# Altium PCB RobotPCB.PcbDoc
Units mm, origin at the board's own origin, x right, y up, seen from the top; angles counter-clockwise.
Board outline 96 x 94 mm, 2 copper layers (Top Layer, Bottom Layer), stack 1.071 mm thick; 70 components, 74 nets, 321 pads, 203 vias.
Unrouted connection lines stored in the file: 1.
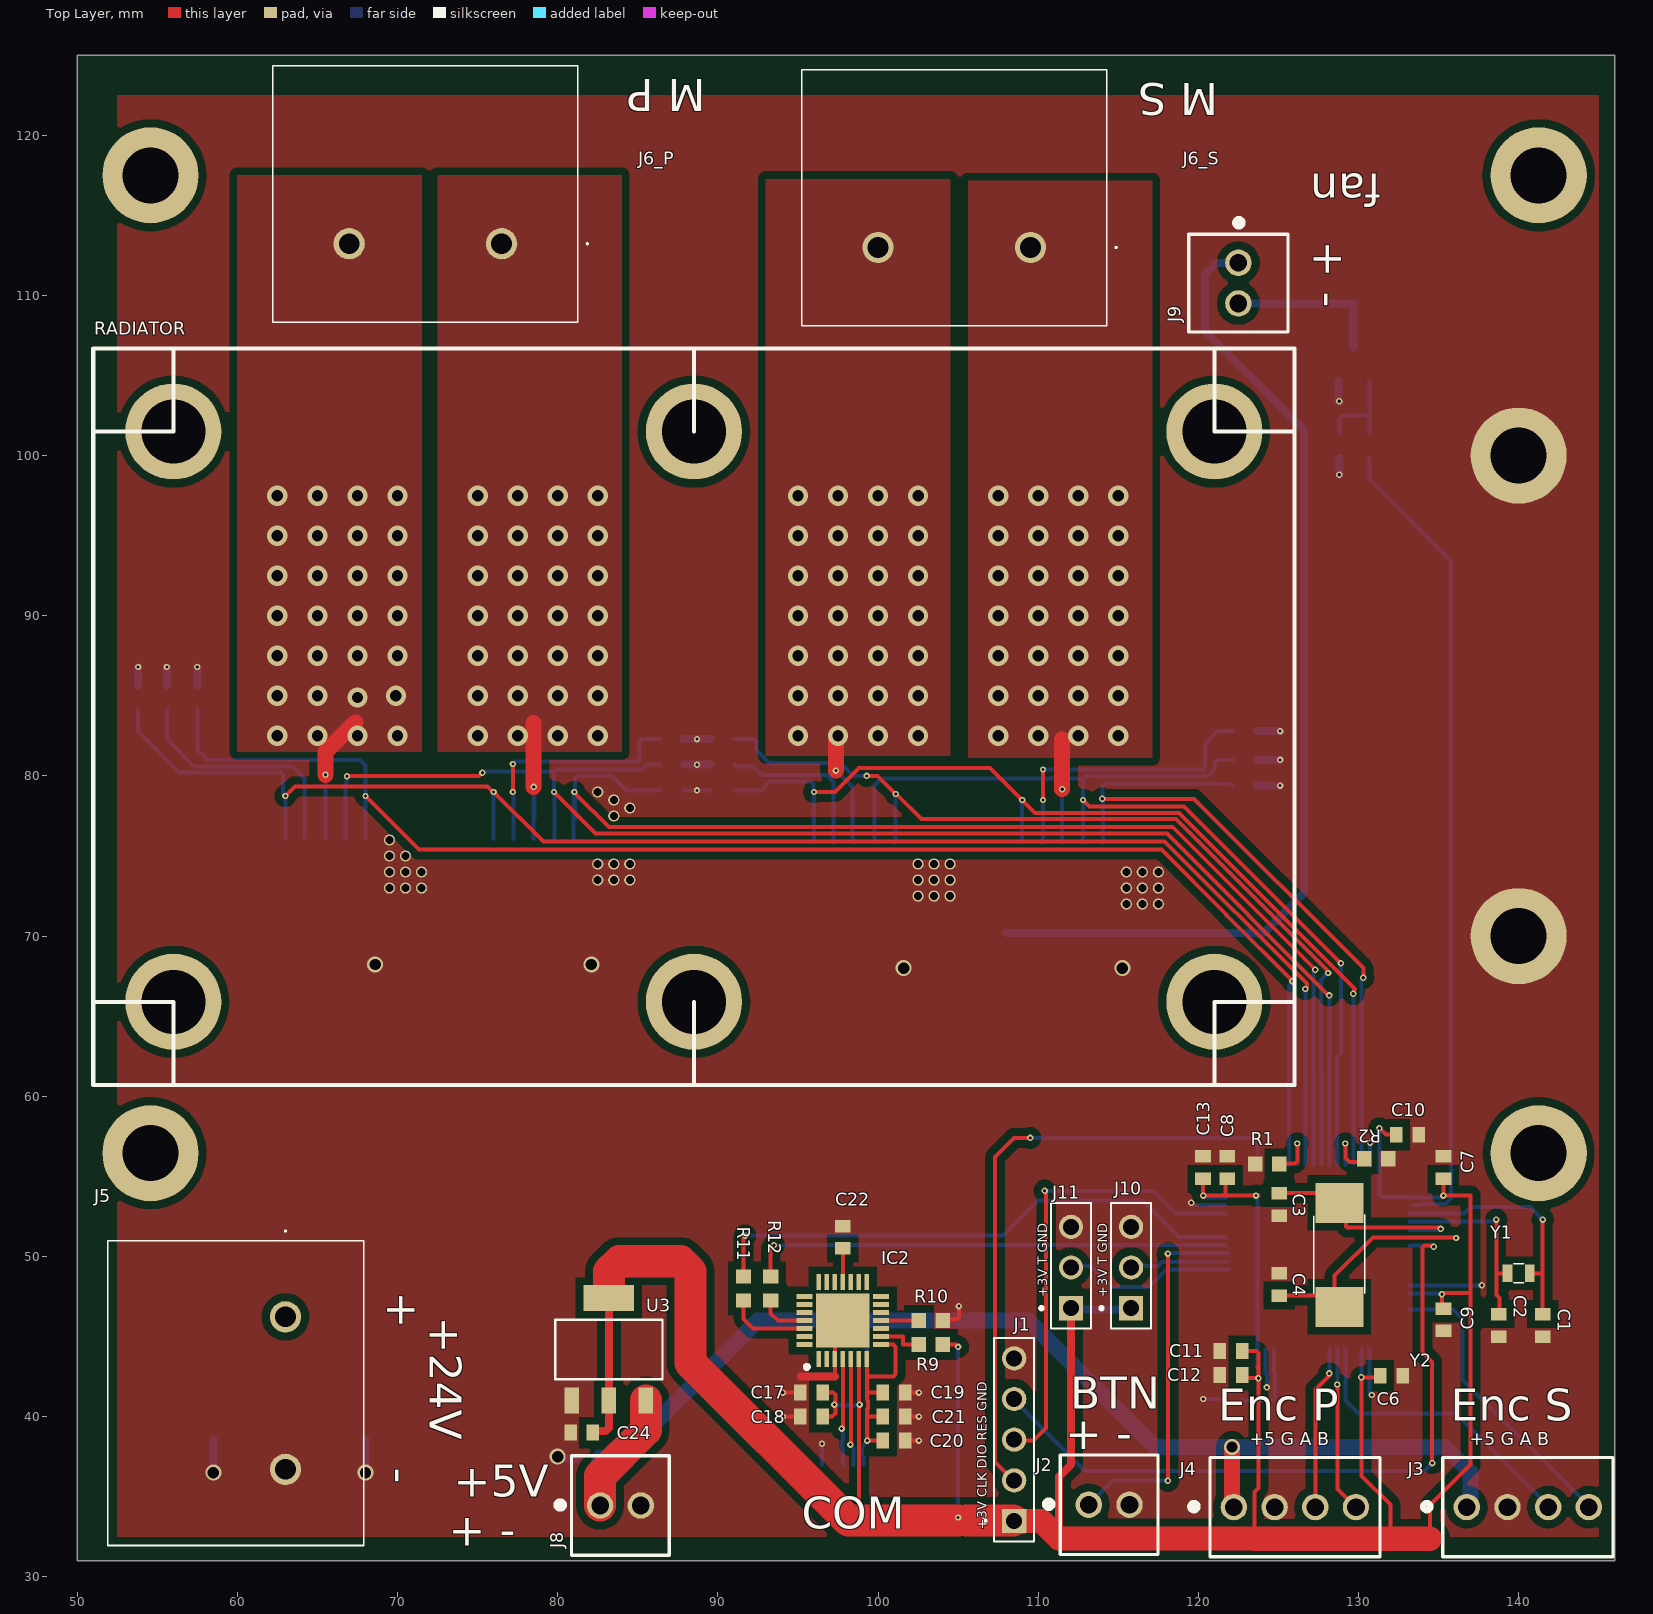
[diagram p0: Top Layer view]
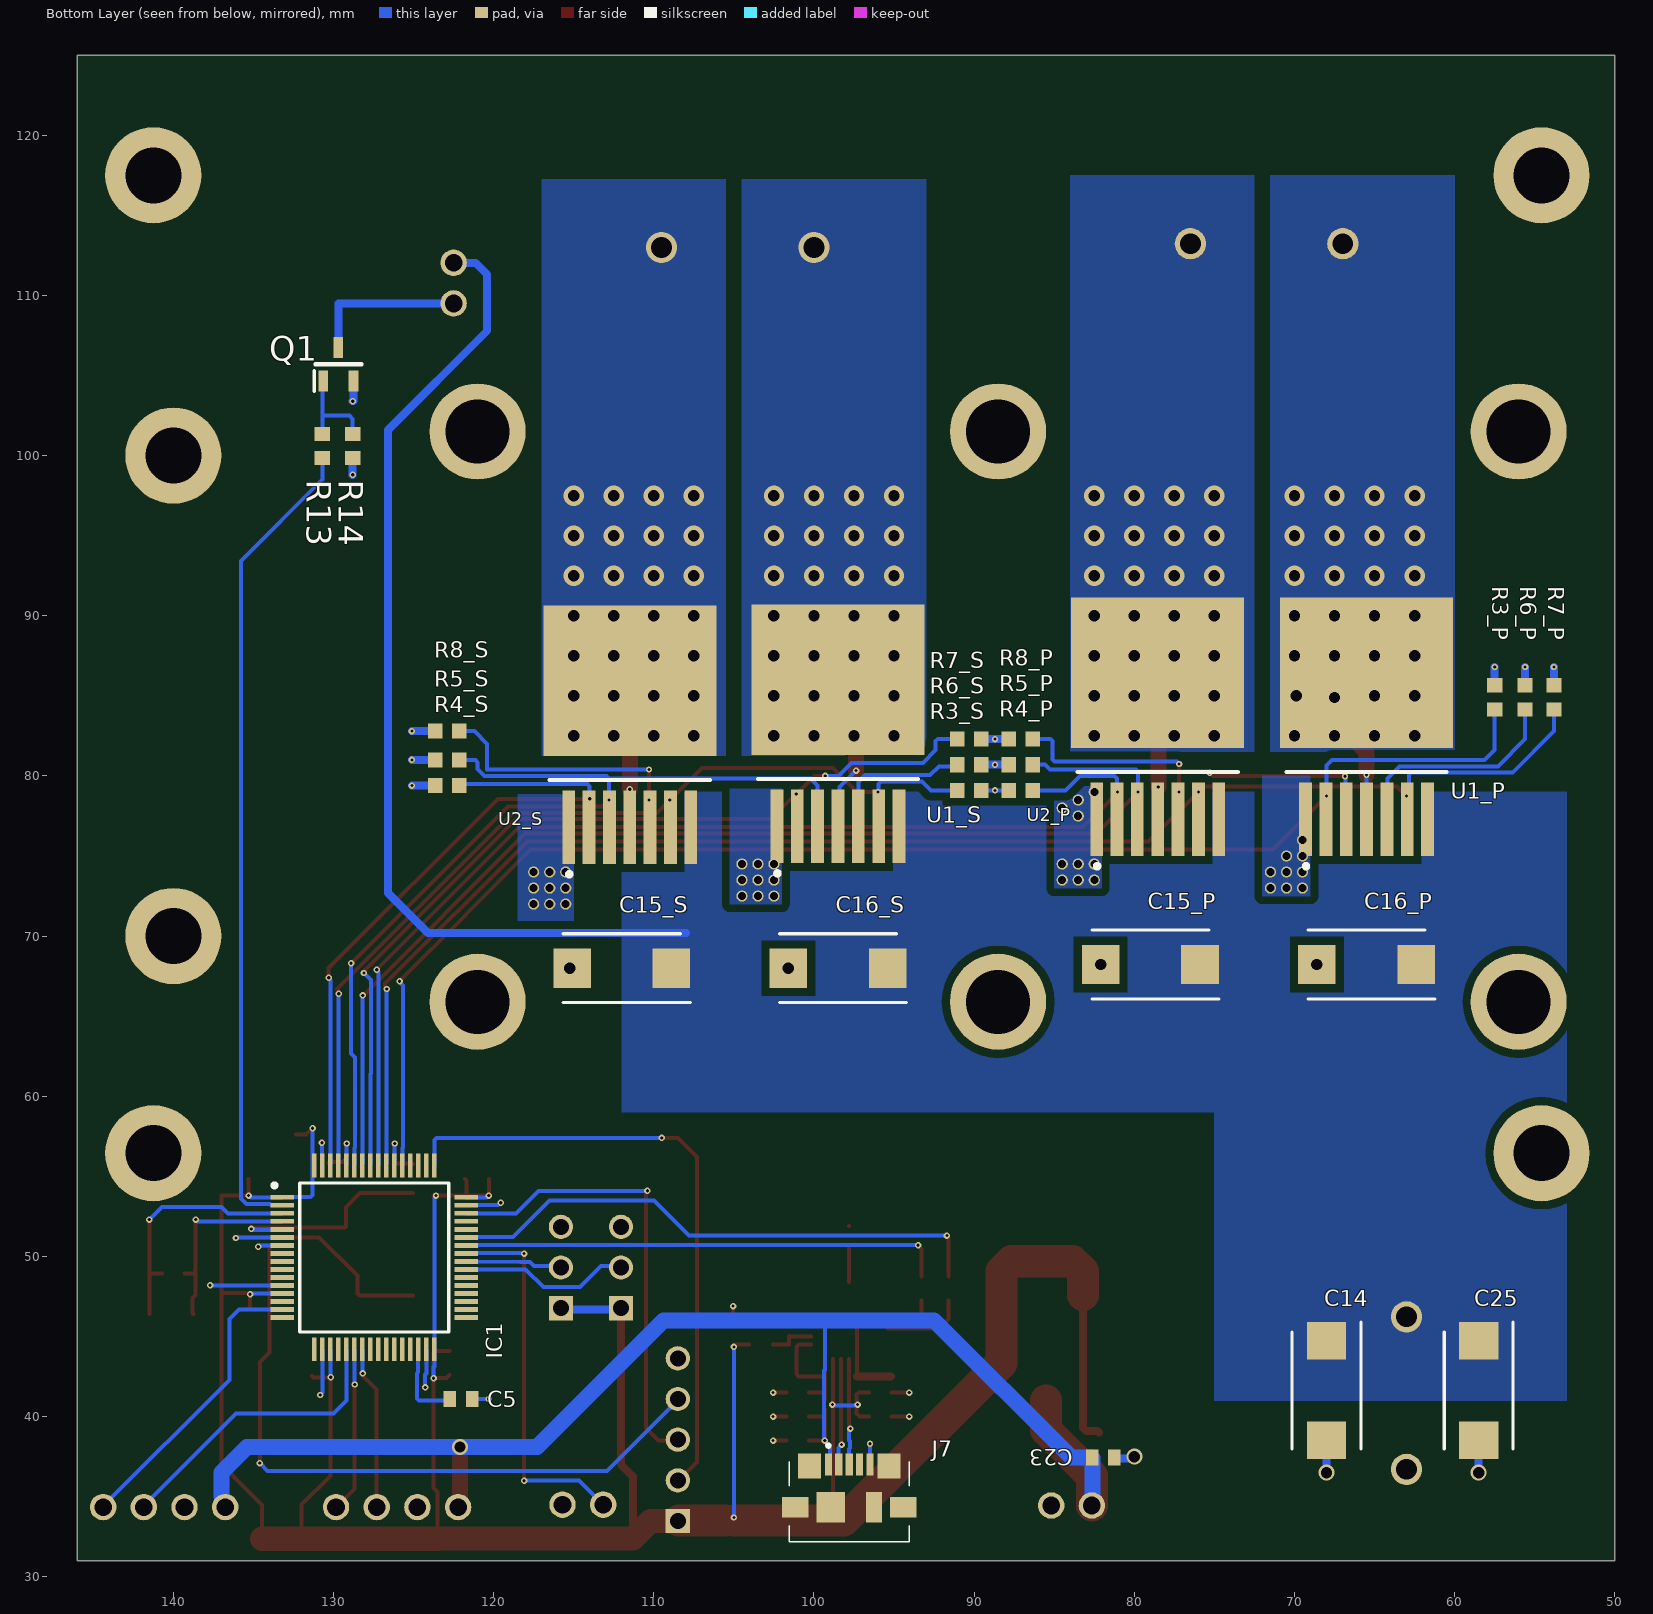
[diagram p1: Bottom Layer view, seen from below]
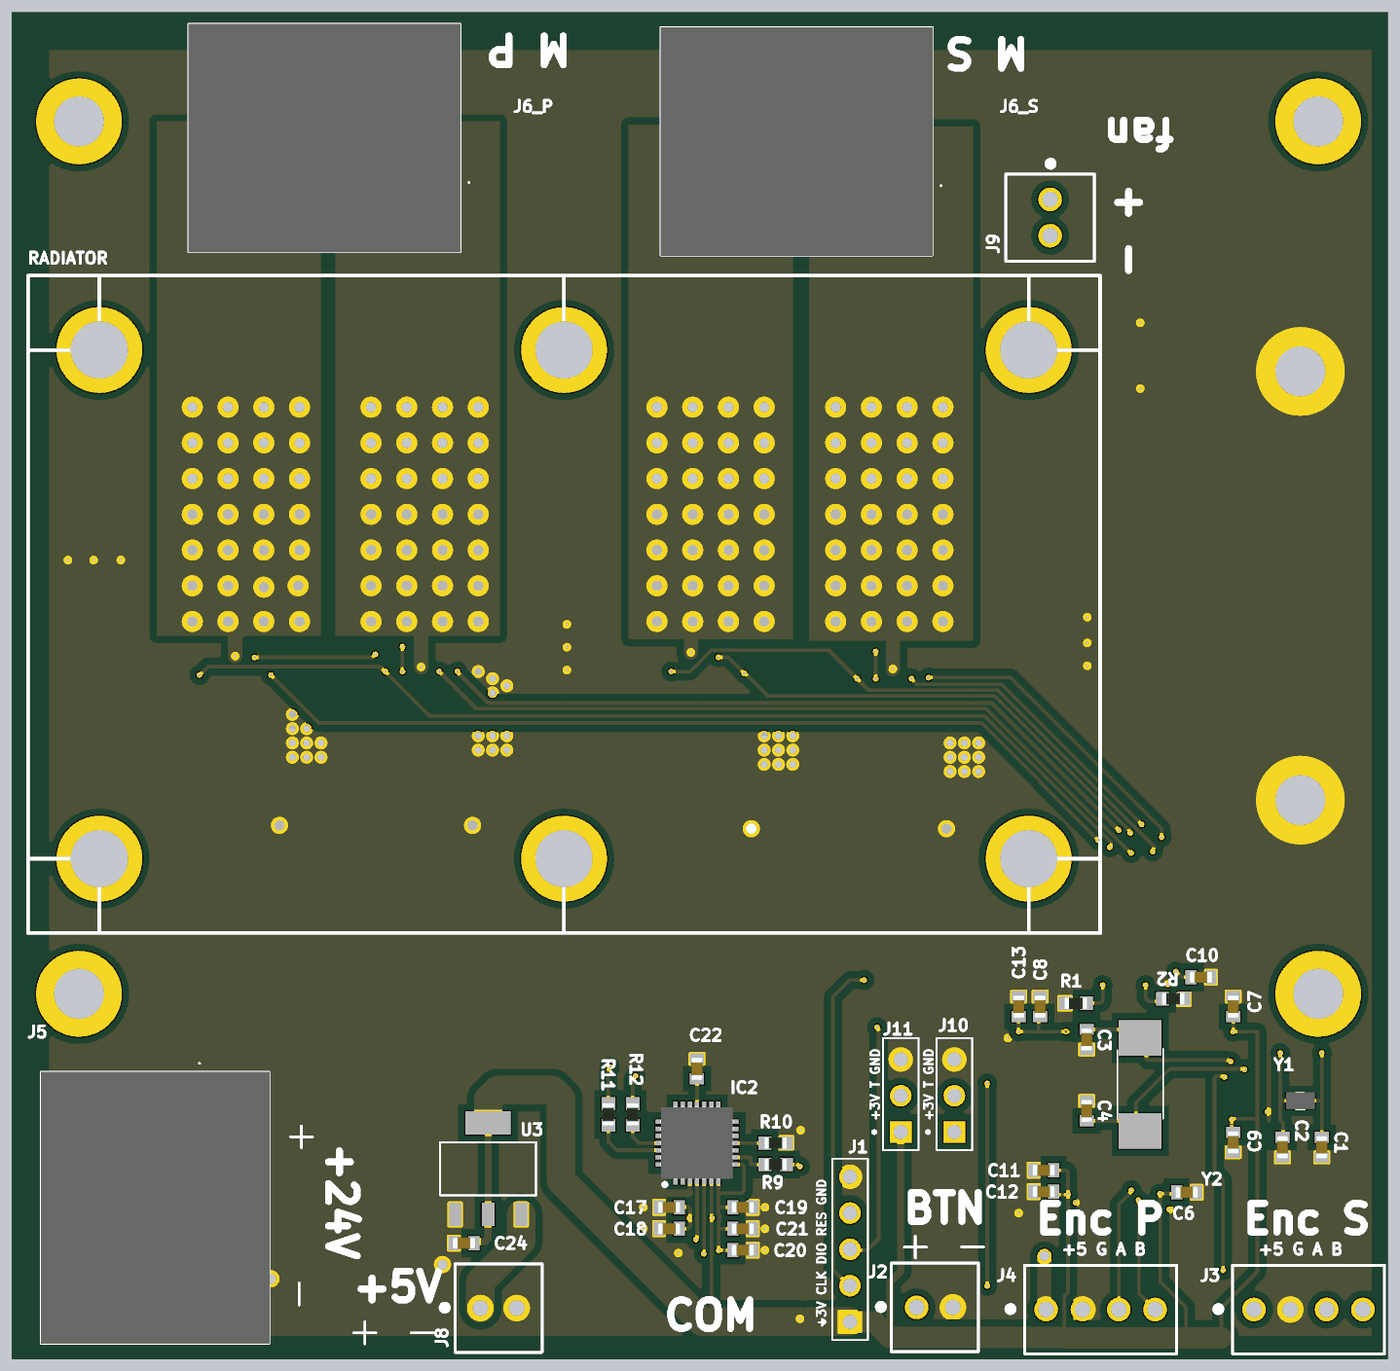
[diagram p2: 3D render of the assembled board from above, using the file's embedded part models]
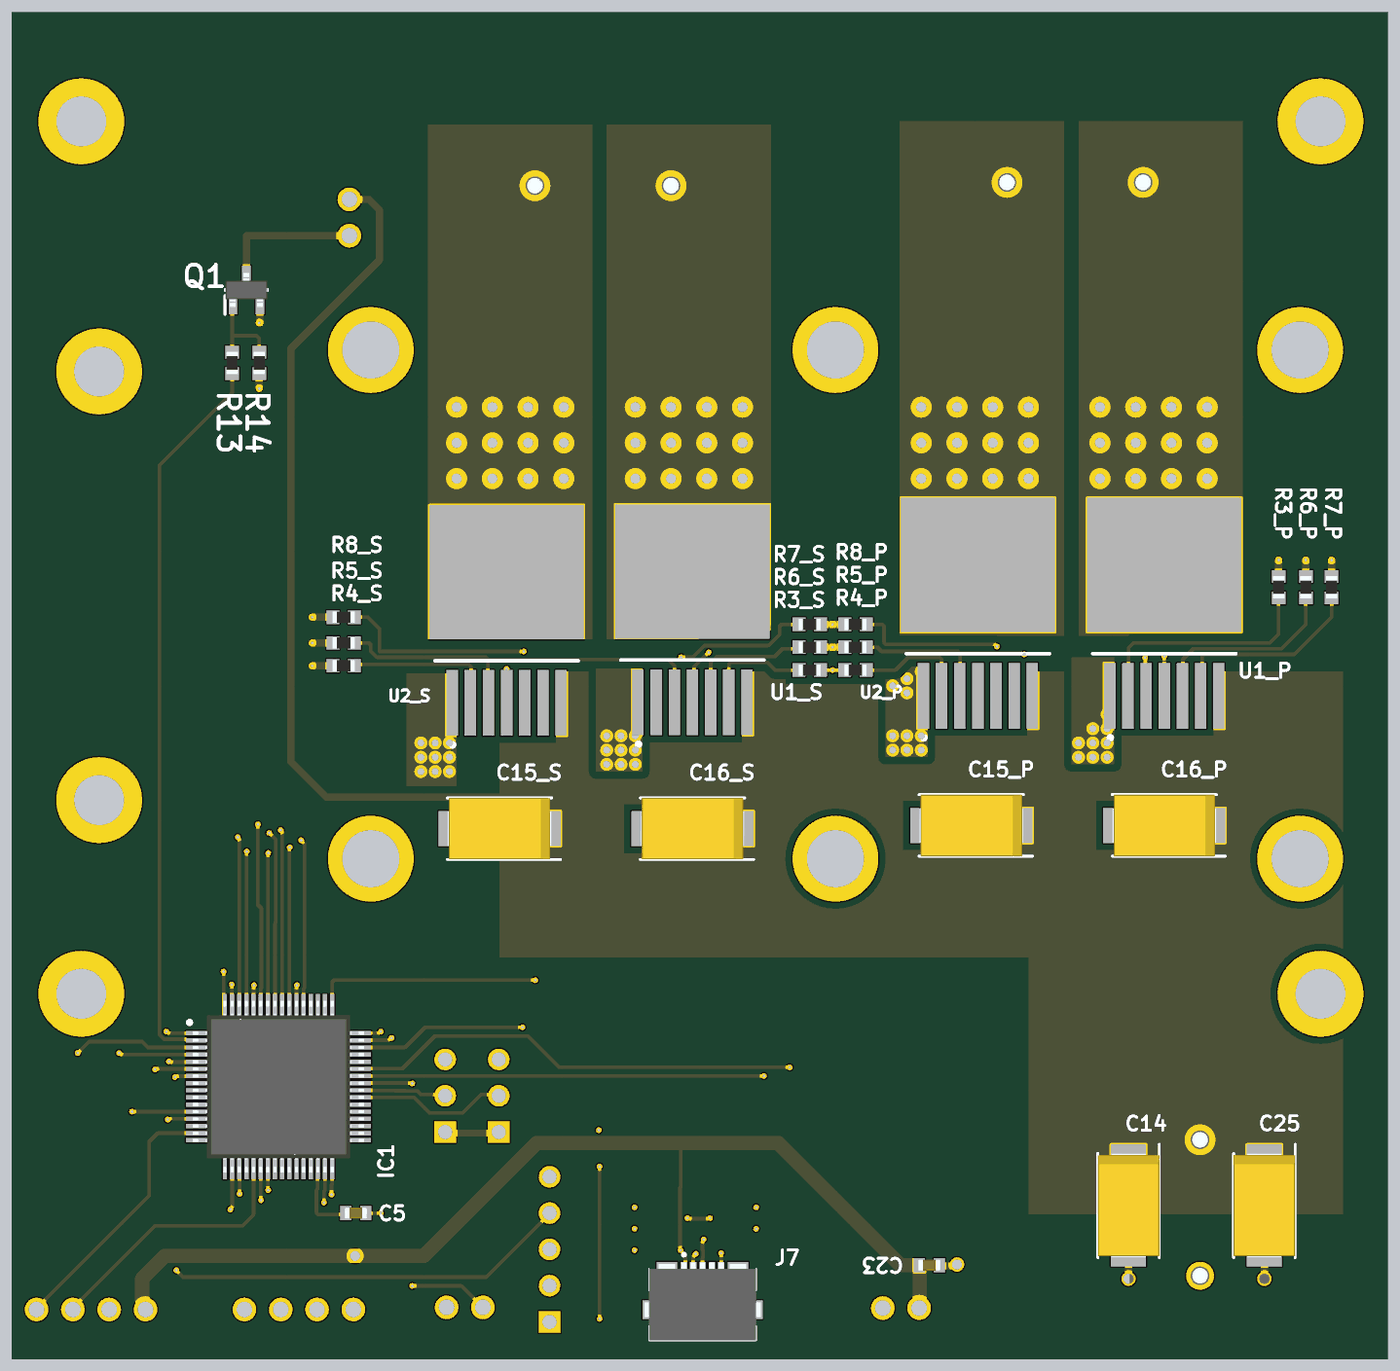
[diagram p3: 3D render of the assembled board from below, using the file's embedded part models]

## Layer stack, top to bottom
Top Solder: solder mask 0.0102, Solder Resist, Dk 3.5
Top Layer: signal copper 0.0356
Dielectric 1: dielectric 1, FR-4, Dk 4.8
Bottom Layer: signal copper 0.0356
Bottom Solder: solder mask 0.0102, Solder Resist, Dk 3.5

## Board outline
50,31 50,125 146,125 146,31

## Design rules (kind name [scope] priority, off if disabled: settings)
Clearance HC [InPolygonClass('high_current')] p1: gap=0.5 ignorepadtopadclearanceinfootprint=FALSE
Clearance [not InPolygonClass('high_current')] p2: gap=0.2 ignorepadtopadclearanceinfootprint=TRUE
Height [All] p1 off: minheight=0 maxheight=50 prefheight=12.7
HoleSize [All] p1: absolutevalues=TRUE maxlimit=5 minlimit=0.15 maxpercent=80.000 minpercent=20.000
HoleToHoleClearance [All] p1: gap=0.2 allowstackedmicrovias=TRUE
MinimumSolderMaskSliver [All] p1: minsoldermaskwidth=0.2
PlaneClearance [All] p1: clearance=0.5
PlaneConnect [All] p1: planeconnectstyle=Relief reliefexpansion=0.5 reliefentries=4 reliefconductorwidth=0.25 reliefairgap=0.25
PolygonConnect HighCurrent [InPolygonClass('high_current')] p1: connectstyle=Direct reliefconductorwidth=0.254 reliefentries=4 polygonreliefangle="90 Angle" airgapwidth=0.254
PolygonConnect [All] p2: connectstyle=Relief reliefconductorwidth=0.5 reliefentries=4 polygonreliefangle="90 Angle" airgapwidth=0.25
RoomDefinition Power [InComponentClass('Power')] p1: confinementstyle=ConfineIn formatcopy=TRUE lockcomponents=FALSE outline 79.5,49.2 79.5,31.2 87.25,31.2 87.25,49.2
RoomDefinition STMF446 [InComponentClass('STMF446')] p2: confinementstyle=ConfineIn formatcopy=TRUE lockcomponents=FALSE outline 106.3,62.85 106.3,31.1 145.94,31.1 145.94,62.85
RoomDefinition СomPort [InComponentClass('СomPort')] p3: confinementstyle=ConfineIn formatcopy=TRUE lockcomponents=FALSE outline 105.8,53 105.8,31.25 87.3,31.25 87.3,53
RoomDefinition P [InComponentClass('P')] p4: confinementstyle=ConfineIn formatcopy=TRUE lockcomponents=FALSE outline 84.5,56 84.5,126 59.45,126 59.45,56
RoomDefinition S [InComponentClass('S')] p5: confinementstyle=ConfineIn formatcopy=TRUE lockcomponents=FALSE outline 117.5,56 117.5,126 92.5,126 92.5,56
RoomDefinition Radiator [InComponentClass('Radiator')] p6: confinementstyle=ConfineIn formatcopy=TRUE lockcomponents=FALSE outline 146,60.1 146,121 50.2,121 50.2,60.1
RoomDefinition MAIN [InComponentClass('MAIN')] p7: confinementstyle=ConfineIn formatcopy=TRUE lockcomponents=FALSE outline 50.5,31 72,31 72,52.75 50.5,52.75
RoutingCorners [All] p1: cornerstyle=45-Degree minsetback=2.5 maxsetback=2.5
RoutingVias [All] p1: holewidth=0.3 width=0.5 viastyle="Through Hole" minholewidth=0.15 minwidth=0.4 maxholewidth=0.711 maxwidth=1.27
SilkToSilkClearance [All] p1 off: silktosilkclearance=0.2
SilkToSolderMaskClearance [IsPad] p1 off: minsilkscreentomaskgap=0.254 clearancetoexposedcopper=TRUE
SolderMaskExpansion [All] p1: expansion=0.102 istentingtop=FALSE
UnRoutedNet [All] p1: checkbadconnections=TRUE
Width [All] p1: maxlimit=2 minlimit=0.15 preferedwidth=0.25
20 further rules are at their usual default settings.

## Classes and differential pairs
polygon class high_current: GND_L02_P017 GND_L02_P018 GND_L02_P019 GND_L02_P020 GND_polygon M+_P_L01_P013 M+_P_L02_P006 M+_S_L01_P007 M+_S_L02_P008 M-_P_L01_P000 M-_P_L02_P004 M-_S_L01_P003 M-_S_L02_P002 VS_P_L02_P021
channel class H_bridge: P S
net class PC[0..15]: PC0 PC1 PC2 PC3 PC4 PC5 PC6 PC7 PC8 PC9 PC10 PC11 PC12 PC13 PC14 PC15
net class PB[0..15]: PB0 PB1 PB2 PB3 PB4 PB5 PB6 PB7 PB8 PB9 PB10 PB11 PB12 PB13 PB14 PB15
net class PA[0..15]: PA0 PA1 PA2 PA3 PA4 PA5 PA6 PA7 PA8 PA9 PA10 PA11 PA12 PA13 PA14 PA15
component class СomPort: C17 C18 C19 C20 C21 C22 IC2 J7 R9 R10 R11 R12
component class S: C15_S C16_S J6_S R3_S R4_S R5_S R6_S R7_S R8_S U1_S U2_S
component class STMF446: C1 C2 C3 C4 C5 C6 C7 C8 C9 C10 C11 C12 C13 IC1 J1 J2 J3 J4 J10 J11 R1 R2 Y1 Y2
component class Radiator: J9 Q1 R13 R14 RADIATOR
component class P: C15_P C16_P J6_P R3_P R4_P R5_P R6_P R7_P R8_P U1_P U2_P
component class Power: C23 C24 J8 U3
component class MAIN: C14 C25 J5

## Components (designator, comment, footprint, x,y, rotation, side; value= is the part's Value field where it differs from the comment)
C1 "12.5 pf" CAPC1608X90N 141.5,45.7 r90 top
C2 "12.5 pf" CAPC1608X90N 138.75,45.7 r90 top
C3 "18 pf" CAPC1608X90N 125.05,53.25 r90 top
C4 "18 pf" CAPC1608X90N 125.05,48.25 r270 top
C5 "2,2 uf" CAPC1608X90N 122.05,41.1 r0 bottom
C6 "2,2 uf" CAPC1608X90N 132.05,42.55 r180 top
C7 "2,2 uf" CAPC1608X90N 135.3,55.55 r270 top
C8 "0.1 uf" CAPC1608X90N 121.8,55.55 r270 top
C9 "0.1 uf" CAPC1608X90N 135.3,46.05 r90 top
C10 "0.1 uf" CAPC1608X90N 133.05,57.6 r180 top
C11 "0.1 uf" CAPC1608X90N 122.05,44.1 r0 top
C12 "0.1 uf" CAPC1608X90N 122.05,42.6 r0 top
C13 "0.1 uf" CAPC1608X90N 120.3,55.55 r270 top
C14 "T494D106K035AT" CAPPM7343X310N 68,41.63 r270 bottom
C15_P "T494D106K035AT" CAPPM7343X310N 79,68.23 r0 bottom (schematic designator C15)
C15_S "T494D106K035AT" CAPPM7343X310N 112,68 r0 bottom (schematic designator C15)
C16_P "T494D106K035AT" CAPPM7343X310N 65.5,68.23 r0 bottom (schematic designator C16)
C16_S "T494D106K035AT" CAPPM7343X310N 98.5,68 r0 bottom (schematic designator C16)
C17 "0.1 uf" CAPC1608X90N 95.85,41.5 r0 top
C18 "4.7 uf" CAPC1608X90N 95.85,40 r0 top
C19 "0.1 uf" CAPC1608X90N 101,41.5 r180 top
C20 "1 uF" CAPC1608X90N 101,38.5 r180 top
C21 "4.7 uf" CAPC1608X90N 101,40 r180 top
C22 "4.7 uf" CAPC1608X90N 97.8,51.2 r270 top
C23 "4.7 uF" CAPC1608X90N 81.939,37.45 r0 bottom
C24 "4.7 uf" CAPC1608X90N 81.5,39 r0 top
C25 "T494D106K035AT" CAPPM7343X310N 58.5,41.63 r270 bottom
IC1 "STM32F446RET6" QFP50P1200X1200X160-64N 127.454,49.942 r180 bottom
IC2 "CP2102-GMR" QFN50P500X500X100-29N-D 97.8,46 r90 top
J1 "PLS-5" TE_826646-5 108.5,38.56 r90 top
J2 "screw terminal 2.54 2p" 1725672-2-2.54 113.16,34.5 r0 top
J3 "screw terminal 2.54 4p" 1725672-4-2.54 136.76,34.35 r0 top
J4 "screw terminal 2.54 4p" 1725672-4-2.54 122.22,34.35 r0 top
J5 "1902547" 1902547 63,46.23 r270 top
J6_P "1902547" 1902547 76.5,113.23 r180 top (schematic designator J6)
J6_S "1902547" 1902547 109.52,113 r180 top (schematic designator J6)
J7 "0473461001" 0473461001 97.8,35.025 r180 bottom
J8 "screw terminal 2.54 2p" 1725672-2-2.54 82.649,34.45 r0 top
J9 "screw terminal 2.54 2p" 1725672-2-2.54 122.5,112.04 r270 top
J10 "PLS-3" TE_826646-3 115.8,51.85 r90 top
J11 "PLS-3" TE_826646-3 112.05,51.85 r90 top
Q1 "IRLML0060TRPBF" SOT95P237X112-3N 129.7,105.7 r90 bottom
R1 "1k" RESC1608X55N 124.3,55.776 r0 top
R2 "1k" RESC1608X55N 131.1,56.1 r0 top
R3_P "1k" RESC1608X55N 57.5,84.9 r270 bottom (schematic designator R3)
R3_S "1k" RESC1608X55N 90.3,82.3 r0 bottom (schematic designator R3)
R4_P "1k" RESC1608X55N 87.1,79.1 r180 bottom (schematic designator R4)
R4_S "1k" RESC1608X55N 122.9,79.4 r180 bottom (schematic designator R4)
R5_P "1k" RESC1608X55N 87.1,80.7 r180 bottom (schematic designator R5)
R5_S "1k" RESC1608X55N 122.9,81 r180 bottom (schematic designator R5)
R6_P "1k" RESC1608X55N 55.6,84.9 r270 bottom (schematic designator R6)
R6_S "1k" RESC1608X55N 90.3,80.7 r0 bottom (schematic designator R6)
R7_P "1k" RESC1608X55N 53.8,84.9 r270 bottom (schematic designator R7)
R7_S "1k" RESC1608X55N 90.3,79.1 r0 bottom (schematic designator R7)
R8_P "1k" RESC1608X55N 87.1,82.3 r180 bottom (schematic designator R8)
R8_S "1k" RESC1608X55N 122.9,82.8 r180 bottom (schematic designator R8)
R9 "4.7k" RESC1608X55N 103.3,44.5 r0 top
R10 "10k" RESC1608X55N 103.3,46 r180 top
R11 "330" RESC1608X55N 91.6,48 r270 top
R12 "330" RESC1608X55N 93.3,48 r270 top
R13 "100" RESC1608X55N 130.7,100.6 r270 bottom
R14 "1K" RESC1608X55N 128.8,100.6 r90 bottom
RADIATOR "Radiator" SK68-75-SA 126,60.7 r90 top (schematic designator RADIATOR*1)
U1_P "BTS7970B" PG-TO263-7-1 64.5,86.5 r90 bottom (schematic designator U1)
U1_S "BTS7970B" PG-TO263-7-1 97.5,86.05 r90 bottom (schematic designator U1)
U2_P "BTS7970B" PG-TO263-7-1 77.54,86.5 r90 bottom (schematic designator U2)
U2_S "BTS7970B" PG-TO263-7-1 110.5,86 r90 bottom (schematic designator U2)
U3 "ADP3338AKCZ-3.3RL7" SOT230-3 83.189,44.2 r90 top
Y1 "32.768KHZ" 9HT1132768KDZBT 140,48.95 r0 top
Y2 "8 MHz" ABM2 128.8,50.1 r90 top

## Footprints (in the part's own frame and the unit in brackets; to place one, negate y for a bottom-side part, rotate by r counter-clockwise, add the part's x,y. Pads: shape width x height; smd on the part's side, far side on the other; paste and mask are expansions set on the pad)
9HT1132768KDZBT [mm]
  rect 0.6x1.1 smd: 1(-0.7,0) 2(0.7,0)
  silkscreen extent -0.3,-0.6 0.3,0.6, body extent -1,-0.6 1,0.6, height 0.7
1725672-2-2.54 [mm]
  round 1.65 hole 1.1: 1(0,0) 2(2.54,0)
  silkscreen extent -2.71,-3.1 4.32,3.1
1725672-4-2.54 [mm]
  round 1.65 hole 1.1: 1(0,0) 2(2.54,0) 3(5.08,0) 4(7.62,0)
  silkscreen extent -2.71,-3.1 9.12,3.1
1902547 [mm]
  round 1.95 hole 1.3: 1(0,0) 2(9.52,0)
  silkscreen extent -5.4,-11.1 14.28,4.9, body extent -4.76,-11.1 14.28,4.9, height 21.8
0473461001 [mm]
  rect 0.45x1.38 smd: 1(-1.3,1.975) 2(-0.65,1.975) 3(0,1.975) 4(0.65,1.975) 5(1.3,1.975)
  rect 1.425x1.55 smd: MP1(-2.487,1.89) MP2(2.487,1.89)
  rect 1.65x1.3 smd: MP3(-3.375,-0.685) MP6(3.375,-0.685)
  rect 1.8x1.9 smd: MP4(-1.15,-0.685)
  rect 1x1.9 smd: MP5(1.55,-0.685)
  silkscreen extent -3.75,-2.84 3.75,3.26, body extent -4.07,-2.84 4.07,2.62, height 2.55
ABM2 [mm]
  rect 2.5x3 smd: 1(-3.25,0) 2(3.25,0)
  silkscreen extent -2.4,-1.6 2.5,1.6
CAPC1608X90N [mm]
  rect 0.78x0.99 smd: 1(-0.7,0) 2(0.7,0)
  body extent -0.8,-0.4 0.8,0.41, height 0.9
CAPPM7343X310N [mm]
  rect 2.35x2.45 smd: 1(-3.1,0) 2(3.1,0)
  silkscreen extent -4.28,-2.15 3.65,2.15, body extent -3.65,-2.15 3.65,2.15, height 3.1
PG-TO263-7-1 [mm]
  rect 4.6x0.8 smd: 1(-9.2,4.81) 2(-9.2,3.54) 3(-9.2,2.27) 4(-9.2,1) 5(-9.2,-0.27) 6(-9.2,-1.54) 7(-9.2,-2.81)
  rect 9.4x10.8 smd: 8(-0.05,1)
  silkscreen extent -12.27,-4 -6.25,6
QFN50P500X500X100-29N-D [mm]
  rect 1x0.3 smd: 1(-2.4,1.5) 2(-2.4,1) 3(-2.4,0.5) 4(-2.4,0) 5(-2.4,-0.5) 6(-2.4,-1) 7(-2.4,-1.5) 15(2.4,-1.5) 16(2.4,-1) 17(2.4,-0.5) 18(2.4,0) 19(2.4,0.5) 20(2.4,1) 21(2.4,1.5)
  rect 0.3x1 smd: 8(-1.5,-2.4) 9(-1,-2.4) 10(-0.5,-2.4) 11(0,-2.4) 12(0.5,-2.4) 13(1,-2.4) 14(1.5,-2.4) 22(1.5,2.4) 23(1,2.4) 24(0.5,2.4) 25(0,2.4) 26(-0.5,2.4) 27(-1,2.4) 28(-1.5,2.4)
  rect 3.35x3.35 smd: 29(0,0)
  silkscreen extent -3.02,2.12 -2.78,2.37, body extent -2.55,-2.55 2.55,2.55, height 1
QFP50P1200X1200X160-64N [mm]
  rect 1.475x0.3 smd: 1(-5.738,3.75) 2(-5.738,3.25) 3(-5.738,2.75) 4(-5.738,2.25) 5(-5.738,1.75) 6(-5.738,1.25) 7(-5.738,0.75) 8(-5.738,0.25) 9(-5.738,-0.25) 10(-5.738,-0.75) 11(-5.738,-1.25) 12(-5.738,-1.75) 13(-5.738,-2.25) 14(-5.738,-2.75) 15(-5.738,-3.25) 16(-5.738,-3.75) 33(5.738,-3.75) 34(5.738,-3.25) 35(5.738,-2.75) 36(5.738,-2.25) 37(5.738,-1.75) 38(5.738,-1.25) 39(5.738,-0.75) 40(5.738,-0.25) 41(5.738,0.25) 42(5.738,0.75) 43(5.738,1.25) 44(5.738,1.75) 45(5.738,2.25) 46(5.738,2.75) 47(5.738,3.25) 48(5.738,3.75)
  rect 0.3x1.475 smd: 17(-3.75,-5.738) 18(-3.25,-5.738) 19(-2.75,-5.738) 20(-2.25,-5.738) 21(-1.75,-5.738) 22(-1.25,-5.738) 23(-0.75,-5.738) 24(-0.25,-5.738) 25(0.25,-5.738) 26(0.75,-5.738) 27(1.25,-5.738) 28(1.75,-5.738) 29(2.25,-5.738) 30(2.75,-5.738) 31(3.25,-5.738) 32(3.75,-5.738) 49(3.75,5.738) 50(3.25,5.738) 51(2.75,5.738) 52(2.25,5.738) 53(1.75,5.738) 54(1.25,5.738) 55(0.75,5.738) 56(0.25,5.738) 57(-0.25,5.738) 58(-0.75,5.738) 59(-1.25,5.738) 60(-1.75,5.738) 61(-2.25,5.738) 62(-2.75,5.738) 63(-3.25,5.738) 64(-3.75,5.738)
  silkscreen extent -6.35,-4.65 4.65,4.65, body extent -6,-6 6,6, height 1.6
RESC1608X55N [mm]
  rect 0.9x0.95 smd: 1(-0.75,0) 2(0.75,0)
  body extent -0.77,-0.4 0.77,0.4, height 0.55
SK68-75-SA [mm] "SK68-75-SA"
  round 6 hole 4: 0(5.2,70) 0(5.2,37.5) 0(5.2,5) 0(40.8,70) 0(40.8,5) 0(40.8,37.5)
  silkscreen extent 0,0 46,75
SOT95P237X112-3N [mm]
  rect 1.3x0.6 smd: 1(-1.05,0.95) 2(-1.05,-0.95) 3(1.05,0)
  silkscreen extent -1.7,-1.46 0.05,1.5, body extent -1.18,-1.46 1.19,1.46, height 1.12
SOT230-3 [mil]
  rect 64x35 smd: 1(-126,91) 2(-126,0) 3(-126,-91)
  rect 64x125 smd: 2(126,0)
  silkscreen extent -73,-132 73,132
TE_826646-3 [mm]
  rect 1.508x1.508 hole 1: 1(-5.08,0)
  round 1.508 hole 1: 2(-2.54,0) 3(0,0)
  silkscreen extent -6.35,-1.25 1.5,1.95
TE_826646-5 [mm]
  rect 1.508x1.508 hole 1: 1(-5.08,0)
  round 1.508 hole 1: 2(-2.54,0) 3(0,0) 4(2.54,0) 5(5.08,0)
  silkscreen extent -6.35,-1.25 6.35,1.95

## Part data
C1 C2 C3 C4: library part 0603, "AVX 18pF 200V dc 0603", Manufacturer_Name=AVX, Datasheet Link=https://at.rs-online.com/web/p/keramik-vielschichtkondensatoren/6983970/, Height=0.9mm
C5 C6 C7: library part 0603, "Murata 2.2 uF X7R 10% 10V dc 0603", Manufacturer_Name=Murata, Manufacturer_Part_Number=06033C393JAT2A, Datasheet Link=https://at.rs-online.com/web/p/keramik-vielschichtkondensatoren/7235597/, Height=0.9mm
C8 C9 C10 C11 C12 C13 C17 C19: library part 0603, "AVX 0.1 uF 16v dc 0603", Manufacturer_Name=AVX, Datasheet Link=https://at.rs-online.com/web/p/keramik-vielschichtkondensatoren/1358340/, Height=0.9mm
C14 C15_P C15_S C16_P C16_S C25: "Capacitor Polarised", Manufacturer_Name=Kemet, Mouser Part Number=80-T494D106K035, Arrow Part Number=T494D106K035AT, Arrow Price/Stock=https://www.arrow.com/en/products/t494d106k035at/kemet-corporation, Datasheet Link=http://www.mouser.com/ds/2/212/kemet_kem_t2008_t494-544880.pdf, Height=3.1mm, Manufacturer_Part_Number=T494D106K035AT, Mouser Price/Stock=https://www.mouser.com/Search/Refine.aspx?Keyword=80-T494D106K035
C18 C21 C22 C23 C24: library part 0603, "AVX, SMD MLCC 4.7 uF 10 V dc, 0603", Manufacturer_Name=AVX, Datasheet Link=https://at.rs-online.com/web/p/keramik-vielschichtkondensatoren/1353676/, Height=0.9mm
C20: library part 0603, "AVX SMD 1uF 16V 0603", Manufacturer_Name=AVX, Datasheet Link=https://at.rs-online.com/web/p/keramik-vielschichtkondensatoren/8882257/, Height=0.9mm
IC1: "Integrated Circuit", Manufacturer_Name=STMicroelectronics, Mouser Part Number=511-STM32F446RET6, Arrow Part Number=STM32F446RET6, Arrow Price/Stock=https://www.arrow.com/en/products/stm32f446ret6/stmicroelectronics, Datasheet Link=http://docs-emea.rs-online.com/webdocs/14d7/0900766b814d7c59.pdf, Height=1.6mm, Manufacturer_Part_Number=STM32F446RET6, Mouser Price/Stock=https://www.mouser.co.uk/ProductDetail/STMicroelectronics/STM32F446RET6?qs=Ok1pvOkw6%2FqpQsWf8F4wtQ%3D%3D
IC2: "Integrated Circuit", Manufacturer_Name="Silicon Labs", Mouser Part Number=634-CP2102-GMR, Arrow Part Number=CP2102-GMR, Arrow Price/Stock=https://www.arrow.com/en/products/cp2102-gmr/silicon-labs, Datasheet Link=https://at.rs-online.com/web/p/multiprotokoll-transceiver/5268841/, Height=1mm, Manufacturer_Part_Number=CP2102-GMR, Mouser Price/Stock=https://www.mouser.co.uk/ProductDetail/Silicon-Labs/CP2102-GMR?qs=cNyzPCcHMUWu%2FiPhR8KQAw%3D%3D
J1 J10 J11: "Board-To-Board Connector, Through Hole, Header, 5, 2.54 mm, Gold Plated Contacts", Package=None, Availability=Unavailable, EU_RoHS_Compliance=Compliant, MF="TE Connectivity", MP=826646-5, Price=None, SnapEDA_Link=https://www.snapeda.com/parts/826646-5/TE%20Connectivity%20AMP%20Connectors/view-part/2389611/?ref=snap, TE_purchase_URL=https://www.te.com/usa-en/product-826646-5.html?te_bu=Cor&te_type=disp&te_campaign=seda_glo_cor-seda-global-disp-prtnr-fy19-seda-model-bom-cta_sma-317_1&elqCampaignId=32493
J2 J3 J4 J8 J9: "Connector", Arrow Part Number=1725672, Manufacturer_Name="Phoenix Contact", Mouser Part Number=651-1725672, Arrow Price/Stock=https://www.arrow.com/en/products/1725672/phoenix-contact, Datasheet Link=https://www.phoenixcontact.com/online/portal/us?uri=pxc-oc-itemdetail:pid=1725672&library=usen&tab=1.pdf, Manufacturer_Part_Number=1725672, Mouser Price/Stock=https://www.mouser.co.uk/ProductDetail/Phoenix-Contact/1725672?qs=Ul7CXFMnlWXX93F9bOV2pQ%3D%3D
J5: "Connector", Manufacturer_Name="Phoenix Contact", Mouser Part Number=651-1902547, Arrow Part Number=1902547, Arrow Price/Stock=https://www.arrow.com/en/products/1902547/phoenix-contact, Datasheet Link=https://www.arrow.com/en/products/1902547/phoenix-contact, Height=21.7mm, Manufacturer_Part_Number=1902547, Mouser Price/Stock=https://www.mouser.co.uk/ProductDetail/Phoenix-Contact/1902547?qs=wd%252Bw3mUqFrmbAnEXicRpKg%3D%3D
J6_P J6_S: "Phoenix Contact MKDS 5 HV/2-9.52", Manufacturer_Name="Phoenix Contact", Mouser Part Number=651-1902547, Arrow Part Number=1902547, Arrow Price/Stock=https://www.arrow.com/en/products/1902547/phoenix-contact, Datasheet Link=https://www.arrow.com/en/products/1902547/phoenix-contact, Height=21.7mm, Manufacturer_Part_Number=1902547, Mouser Price/Stock=https://www.mouser.co.uk/ProductDetail/Phoenix-Contact/1902547?qs=wd%252Bw3mUqFrmbAnEXicRpKg%3D%3D
J7: "Connector", Manufacturer_Name=Molex, Mouser Part Number=N/A, Arrow Part Number=0473461001, Arrow Price/Stock=https://www.arrow.com/en/products/0473461001/molex, Datasheet Link=https://componentsearchengine.com/Datasheets/1/0473461001.pdf, Height=2.45mm, Manufacturer_Part_Number=0473461001, Mouser Price/Stock=https://www.mouser.com/Search/Refine.aspx?Keyword=N%2FA
Q1: "MOSFET (N-Channel)", Manufacturer_Name=Infineon, Mouser Part Number=942-IRLML0060TRPBF, Arrow Part Number=IRLML0060TRPBF, Arrow Price/Stock=https://www.arrow.com/en/products/irlml0060trpbf/infineon-technologies-ag, Datasheet Link=https://www.infineon.com/dgdl/irlml0060pbf.pdf?fileId=5546d462533600a40153566493ef25e6, Height=1.12mm, Manufacturer_Part_Number=IRLML0060TRPBF, Mouser Price/Stock=https://www.mouser.co.uk/ProductDetail/Infineon-IR/IRLML0060TRPBF?qs=9%252BKlkBgLFf3sC4ri8n%252Bt9Q%3D%3D
R1 R2 R3_P R3_S R4_P R4_S R5_P R5_S R6_P R6_S R7_P R7_S R8_P R8_S: library part "res 0603", "RS PRO SMD-Widerstand, 1kΩ ±5%", Manufacturer_Name="RS PRO", Datasheet Link=https://at.rs-online.com/web/p/smd-widerstande/7134141/, Height=0.55mm
R9: library part "res 0603", "4.7k 0603", Arrow Part Number=CPF0603B100RE1, Manufacturer_Name="TE Connectivity", Mouser Part Number=279-CPF0603B100RE1, Arrow Price/Stock=https://www.arrow.com/en/products/cpf0603b100re1/te-connectivity, Datasheet Link=http://www.farnell.com/datasheets/1786775.pdf, Height=0.55mm, Manufacturer_Part_Number=CPF0603B100RE1, Mouser Price/Stock=https://www.mouser.co.uk/ProductDetail/TE-Connectivity-Neohm/CPF0603B100RE1?qs=DfH2yQaBz6s2KWheq2AlNw%3D%3D
R10: library part "res 0603", "10k 0603", Arrow Part Number=CPF0603B100RE1, Manufacturer_Name="TE Connectivity", Mouser Part Number=279-CPF0603B100RE1, Arrow Price/Stock=https://www.arrow.com/en/products/cpf0603b100re1/te-connectivity, Datasheet Link=http://www.farnell.com/datasheets/1786775.pdf, Height=0.55mm, Manufacturer_Part_Number=CPF0603B100RE1, Mouser Price/Stock=https://www.mouser.co.uk/ProductDetail/TE-Connectivity-Neohm/CPF0603B100RE1?qs=DfH2yQaBz6s2KWheq2AlNw%3D%3D
R11 R12: library part "res 0603", "330 0603", Arrow Part Number=CPF0603B100RE1, Manufacturer_Name="TE Connectivity", Mouser Part Number=279-CPF0603B100RE1, Arrow Price/Stock=https://www.arrow.com/en/products/cpf0603b100re1/te-connectivity, Datasheet Link=http://www.farnell.com/datasheets/1786775.pdf, Height=0.55mm, Manufacturer_Part_Number=CPF0603B100RE1, Mouser Price/Stock=https://www.mouser.co.uk/ProductDetail/TE-Connectivity-Neohm/CPF0603B100RE1?qs=DfH2yQaBz6s2KWheq2AlNw%3D%3D
R13: library part "res 0603", "100 0603", Arrow Part Number=CPF0603B100RE1, Manufacturer_Name="TE Connectivity", Mouser Part Number=279-CPF0603B100RE1, Arrow Price/Stock=https://www.arrow.com/en/products/cpf0603b100re1/te-connectivity, Datasheet Link=http://www.farnell.com/datasheets/1786775.pdf, Height=0.55mm, Manufacturer_Part_Number=CPF0603B100RE1, Mouser Price/Stock=https://www.mouser.co.uk/ProductDetail/TE-Connectivity-Neohm/CPF0603B100RE1?qs=DfH2yQaBz6s2KWheq2AlNw%3D%3D
R14: library part "res 0603", "1k 0603", Arrow Part Number=CPF0603B100RE1, Manufacturer_Name="TE Connectivity", Mouser Part Number=279-CPF0603B100RE1, Arrow Price/Stock=https://www.arrow.com/en/products/cpf0603b100re1/te-connectivity, Datasheet Link=http://www.farnell.com/datasheets/1786775.pdf, Height=0.55mm, Manufacturer_Part_Number=CPF0603B100RE1, Mouser Price/Stock=https://www.mouser.co.uk/ProductDetail/TE-Connectivity-Neohm/CPF0603B100RE1?qs=DfH2yQaBz6s2KWheq2AlNw%3D%3D
U1_P U1_S U2_P U2_S: "Infineon Motor Driver IC BTN7970BAUMA1, 50A, 25kHz, TO-263, 7-Pin, BLDC", Package=PG-TO263-7-1, Availability=Unavailable, MF=Infineon, MP=BTS7970B, Price=None, SnapEDA_Link=https://at.rs-online.com/web/p/motor-treiber-ics/7264068/
U3: "Linear Voltage Regulator IC 1 Output 1A SOT-223-3", Package="SOT-223 Analog Devices", Arrow_Electronics-Purchase-URL=https://snapeda.com/shop?store=Arrow+Electronics&id=51107, Availability=Good, DigiKey-Purchase-URL=https://snapeda.com/shop?store=DigiKey&id=51107, MF="Analog Devices", Mouser-Purchase-URL=https://snapeda.com/shop?store=Mouser&id=51107, MP=ADP3338AKCZ-3.3RL7, Price=None, SnapEDA_Link=https://www.snapeda.com/parts/ADP3338AKCZ-3.3RL7/Analog%20Devices%20Inc./view-part/51107/?ref=snap
Y1: library part "CM7V-T1A 32.768KHZ", "Quarz CM7V-T1A 32.768KHZ 7PF +/-20PPM TB QA 32.768kHz, ±20ppm", Manufacturer_Name=CM7V, Manufacturer_Part_Number=CM7V-T1A, Datasheet Link=https://at.rs-online.com/web/p/schwingquarz/1735831/, Height=0.6mm
Y2: library part ABM2-8.000MHZ-D4Y-T, "Quarz ABM2-8.000MHZ-D4Y-T 8MHz, ±30ppm", Manufacturer_Name=ABM, Datasheet Link=https://at.rs-online.com/web/p/schwingquarz/1710612/, Height="1.6 mm", Manufacturer_Part_Number=ABM2-8.000MHZ-D4Y-T

## Free pads (board coordinates)
  round 0.7 hole 0.5: 3(69.5,73) 3(69.5,74) 3(69.5,75) 3(69.5,76) 3(70.5,73) 3(70.5,74) 3(70.5,75) 3(71.5,73) 3(71.5,74) 3(82.5,73.5) 3(82.5,74.5) 3(82.5,79) 3(83.5,73.5) 3(83.5,74.5) 3(83.5,77.5) 3(83.5,78.5) 3(84.5,73.5) 3(84.5,74.5) 3(84.5,78) 3(102.5,72.5) 3(102.5,73.5) 3(102.5,74.5) 3(103.5,72.5) 3(103.5,73.5) 3(103.5,74.5) 3(104.5,72.5) 3(104.5,73.5) 3(104.5,74.5) 3(115.5,72) 3(115.5,73) 3(115.5,74) 3(116.5,72) 3(116.5,73) 3(116.5,74) 3(117.5,72) 3(117.5,73) 3(117.5,74)
  round 6 hole 3.5: ""(54.576,56.446) ""(54.576,117.5) ""(140,70) ""(140,100) ""(141.25,56.446) ""(141.25,117.5)

## Via types
v1: diameter 1.27, hole 0.711, Top Layer to Bottom Layer, 112 vias
v2: diameter 0.4, hole 0.2, Top Layer to Bottom Layer, 83 vias
v3: diameter 1, hole 0.711, Top Layer to Bottom Layer, 8 vias

## Nets (pads, with @x,y where several pads share a name; then routed paths per layer and width w, separated by ;. In a path a pad name is that pad's centre, name@x,y a point inside that pad or via, vN(x,y) a via of type N, cw(c..) or ccw(c..) an arc to the next point about the centre after c; other vN are vias at no path point)
+3.3V: C6.2 C7.2 C8.2 C9.2 C10.2 C11.2 C12.2 C13.2 C17.2 C18.2 C24.2 IC1.1 IC1.13 IC1.19 IC1.32 IC1.48 IC1.64 IC2.6 J1.1 J10.1 J11.1 R9.2 U3.2 | length 202.5
  Top Layer w0.25: C18.2 97.135,40 97.332,40.197 97.332,40.652 97.275,40.709 v2(97.275,40.75) ; C17.2@96.567,41.517 97.2,41.517 97.332,41.385 97.332,40.848 97.304,40.819 v2@97.304,40.778 ; 98.8,33.5 v2@98.8,40.725 ; IC2.6 98.8,40.841 98.85,40.791 v2(98.85,40.75) ; R9.2 104.854,44.5 v2(105,44.354) ; C13.2 v2(120.3,53.8) 121.7,53.8 ; C8.2 121.7,54.75 121.7,53.8 ; C12.2 122.95,42.4 v2(123.75,42.4) ; C11.2 123.618,44.1 123.75,43.968 123.75,43.137 123.679,43.067 ; 123.5,32.375 123.5,32.4 123.5,35.3 123.75,35.55 v2(123.75,42.4) ; 123.75,43.068 v2(123.75,42.4) ; v2@123.75,53.8 v2(123.6,53.8) 121.7,53.8 ; v2(131.3,58) 131.7,57.6 C10.2 ; C6.2 131.254,42.454 v2(130.175,42.454) 130.2,42.429 130.2,36.3 132,34.5 132,32.675 132.3,32.375 ; 134.475,32.375 134.475,34.475 137,37 137,47.704 ; v2(135.204,47.642) 135.204,46.846 C9.2 ; C7.2 v2(135.3,53.8) 137,53.8 137,47.704 ; v2@135.372,47.704 137,47.704
  Top Layer w0.5: C24.2 82.3,39.1 82.984,39.1 83.189,39.305 83.189,41 83.2,41.011 83.2,47.389 U3.2@83.189,47.401 ; 111.3,32.4 111.3,36.25 112.05,37 J11.1
  Top Layer w1.5: J1.1@108.504,33.424 108.941,33.424 109.002,33.485 110.215,33.485 111.3,32.4 123.5,32.4 ; 123.5,32.375 132.3,32.375 134.475,32.375
  Top Layer w2: U3.2@83.2,47.588 83.2,49.056 83.844,49.7 87.62,49.7 ; 87.67,49.7 88.3,49.07 88.3,43.35 98.15,33.5 98.8,33.5 105,33.5 ; 105.55,33.5 J1.1@108.42,33.5
  Bottom Layer w0.25: v2(97.275,40.75) 97.316,40.75 97.366,40.7 98.694,40.7 98.715,40.721 98.821,40.721 v2(98.85,40.75) ; v2(105,33.7) v2(105,44.354) ; v2@120.329,53.829 v2(120.3,53.8) 120.341,53.8 120.448,53.692 IC1.48 ; v2(123.6,53.8) 123.6,53.759 123.7,53.659 123.7,44.208 IC1.32 123.7,44.2 123.7,43.136 123.75,43.086 v2(123.75,42.4) ; v2(130.175,42.454) 130.175,43.328 130.179,43.332 130.179,44.179 IC1.19 ; v2(131.3,58) 131.3,53.832 131.432,53.7 133.184,53.7 IC1.1 135.152,53.692 135.259,53.8 v2(135.3,53.8) ; IC1.13 133.2,47.7 135.106,47.7 135.164,47.642 v2(135.204,47.642)
  Bottom Layer w0.5: J11.1 112.12,46.7 115.73,46.7 J10.1
D+: IC2.4 J7.3 | length 6.7
  Top Layer w0.25: v2(97.725,39.25) 97.725,39.291 97.8,39.366 IC2.4
  Bottom Layer w0.25: v2(97.725,39.25) 97.725,39.209 97.8,39.134 97.8,38.517 97.75,38.467 97.75,38.033 97.8,37.983 J7.3
D-: IC2.5 J7.2 | length 6.7
  Top Layer w0.25: v2(98.275,38.25) 98.3,38.275 IC2.5
  Bottom Layer w0.25: v2(98.275,38.25) 98.275,38.228 98.459,38.043 98.459,37.009 J7.2
GND: C1.1 C2.1 C3.1 C4.1 C5.1 C6.1 C7.1 C8.1 C9.1 C10.1 C11.1 C12.1 C13.1 C14.2 C15_P.2 C15_S.2 C16_P.2 C16_S.2 C17.1 C18.1 C19.1 C20.1 C21.1 C22.1 C23.1 C24.1 C25.2 IC1.12 IC1.18 IC1.31 IC1.47 IC1.63 IC2.3 IC2.29 J1.5 J2.2 J3.2 J4.2 J5.2 J7.5 J8.2 J10.3 J11.3 pad.3 pad.@140,70 pad.@140,100 Q1.2 R1.1 R2.2 R3_P.1 R3_S.1 R4_P.1 R4_S.1 R5_P.1 R5_S.1 R6_P.1 R6_S.1 R7_P.1 R7_S.1 R8_P.1 R8_S.1 R10.1 R14.1 U1_P.1 U1_S.1 U2_P.1 U2_S.1 U3.1 | length 49.2
  Top Layer w0.25: v2(94.05,40) C18.1 ; v2(94.05,41.5) C17.1 ; 97.3,42.5 IC2.3 97.3,45.5 IC2.29 ; C20.1 v2(102.55,38.5) ; C21.1 v2(102.55,40) ; C19.1 v2(102.55,41.5) ; R10.1 104.15,46.1 104.918,46.1 105.05,46.232 v2(105.05,46.9)
  Top Layer w0.5: 95.2,42.5 97.3,42.5
  Bottom Layer w0.25: C15_P.2@81.95,68.21 81.95,68.23 v3(82.1,68.23) ; R4_P.1 v2(88.7,79.1) R7_S.1 ; J7.5 v2(96.5,38.3) ; C16_S.2@101.45,68 v3(101.6,68) ; C15_S.2 v3(115.25,68) ; v2(119.55,53.35) 119.591,53.35 119.741,53.2 IC1.47@121.673,53.2 ; v2(120.3,41.1) C5.1 ; IC1.31 124.204,42.688 124.275,42.617 v2(124.275,41.826) ; IC1.18 130.7,44.2 130.7,41.516 130.825,41.391 v2(130.825,41.35) ; IC1.63 130.715,55.691 130.715,57.09 v2(130.725,57.1) ; IC1.12 133.2,48.2 v2(137.7,48.2)
  Bottom Layer w0.5: R7_P.1 v2(53.8,86.8) ; R6_P.1 v2(55.6,86.8) ; R3_P.1 v2(57.5,86.8) ; v3(58.5,36.5) C25.2 ; v3(68,36.5) C14.2 ; v3(80,37.5) 80.135,37.5 80.235,37.4 81.188,37.4 C23.1 ; R5_P.1 v2(88.7,80.7) R6_S.1 ; R8_P.1 v2(88.7,82.3) R3_S.1 ; R4_S.1 v2(125.1,79.4) ; R5_S.1 v2(125.1,81) ; R8_S.1 v2(125.1,82.8) ; Q1.2 128.75,103.4 v2(128.8,103.4) ; v2(128.8,98.8) R14.1
  other v3: 68.6,68.23
M+_P: J6_P.1 U2_P.4 U2_P.8 | length 6
  Top Layer w1: v2(78.5,79.313) 78.5,83.3
  Bottom Layer w0.25: v2(78.5,79.313) 78.54,79.273 U2_P.4
  other v1: 75,82.5 77.5,82.5 80,82.5 82.5,82.5 75,85 77.5,85 80,85 82.5,85 75,87.5 77.5,87.5 80,87.5 82.5,87.5 75,90 77.5,90 80,90 82.5,90 75,92.5 77.5,92.5 80,92.5 82.5,92.5 75,95 77.5,95 80,95 82.5,95 75,97.5 77.5,97.5 80,97.5 82.5,97.5
M+_S: J6_S.1 U2_S.4 U2_S.8 | length 5.9
  Top Layer w0.25: 111.5,82.266 111.795,82.561
  Top Layer w1: v2(111.5,79.175) 111.5,82.266
  Bottom Layer w0.25: U2_S.4 v2(111.5,79.175)
  other v1: 107.5,82.5 110,82.5 112.5,82.5 115,82.5 107.5,85 110,85 112.5,85 115,85 107.5,87.5 110,87.5 112.5,87.5 115,87.5 107.5,90 110,90 112.5,90 115,90 107.5,92.5 110,92.5 112.5,92.5 115,92.5 107.5,95 110,95 112.5,95 115,95 107.5,97.5 110,97.5 112.5,97.5 115,97.5
M-_P: J6_P.2 U1_P.4 U1_P.8 | length 8
  Top Layer w1: v2(65.5,80.075) 65.5,81.47 67.368,83.338
  Bottom Layer w0.25: U1_P.4@65.5,76.07 v2(65.5,80.075)
  other v1: 62.5,82.5 65,82.5 67.5,82.5 70,82.5 67.5,84.9 62.5,85 65,85 69.9,85 62.5,87.5 65,87.5 67.5,87.5 70,87.5 62.5,90 65,90 67.5,90 70,90 62.5,92.5 65,92.5 67.5,92.5 70,92.5 62.5,95 65,95 67.5,95 70,95 62.5,97.5 65,97.5 67.5,97.5 70,97.5
M-_S: J6_S.2 U1_S.4 U1_S.8 | length 7.2
  Top Layer w0.5: v1@97.37,82.37 v1(97.5,82.5)
  Top Layer w1: v2(97.37,80.337) v1@97.37,82.37
  Bottom Layer w0.25: v2(97.37,80.337) 98.4,79.307 98.4,75.94 U1_S.4@98.5,75.84
  other v1: 95,82.5 100,82.5 102.5,82.5 95,85 97.5,85 100,85 102.5,85 95,87.5 97.5,87.5 100,87.5 102.5,87.5 95,90 97.5,90 100,90 102.5,90 95,92.5 97.5,92.5 100,92.5 102.5,92.5 95,95 97.5,95 100,95 102.5,95 95,97.5 97.5,97.5 100,97.5 102.5,97.5
NetC5_2: C5.2 IC1.30 | length 5.3
  Bottom Layer w0.25: C5.2 122.85,41 124.668,41 124.8,41.132 124.8,42.043 124.8,42.7 124.729,42.771 124.729,44.179 IC1.30
NetC22_2: C22.2 IC2.18 | length 2.1
  Top Layer w0.25: IC2.18 C22.2
NetIC1_54: IC1.54 R1.2 | length 3.6
  Top Layer w0.25: R1.2 125.074,55.8 126.043,55.8 126.175,55.932 v2(126.175,57.05)
  Bottom Layer w0.25: v2(126.175,57.05) 126.2,57.025 IC1.54@126.2,55.781
NetIC1_60: IC1.60 R2.1 | length 3.5
  Top Layer w0.25: v2(129.175,57.05) 129.175,56.157 129.432,55.9 130.25,55.9 R2.1@130.3,55.85
  Bottom Layer w0.25: v2(129.175,57.05) 129.2,57.025 IC1.60@129.2,55.724
NetIC2_9: IC2.9 R9.1 | length 2.8
  Top Layer w0.25: IC2.9 101.55,45 101.55,44.5 R9.1
NetIC2_11: IC2.11 R10.2 | length 2.3
  Top Layer w0.25: IC2.11 R10.2
NetIC2_25: IC2.25 R12.2 | length 3.1
  Top Layer w0.25: R12.2 93.3,46.45 93.75,46 IC2.25
NetIC2_26: IC2.26 R11.2 | length 5.2
  Top Layer w0.25: R11.2 91.6,46.1 92.2,45.5 IC2.26
NetJ9_2: J9.2 Q1.3 | length 10
  Bottom Layer w0.5: J9.2 129.7,109.5 Q1.3
NetQ1_1: Q1.1 R13.1 R14.2 | length 6.3
  Bottom Layer w0.25: R14.2 128.8,102.3 129,102.5 130.7,102.5 ; Q1.1 130.7,104.65 130.7,102.5 ; R13.1 130.7,102.5
NetR6_P_2: R6_P.2 U1_P.5 | length 15.2
  Bottom Layer w0.25: R6_P.2 55.6,82.3 57.3,80.6 63.454,80.6 64.2,79.854 U1_P.5@64.2,76.1
NetR6_S_2: R6_S.2 U1_S.5 | length 10.4
  Bottom Layer w0.25: R6_S.2 91.15,80.6 92.195,80.6 92.748,80.047 96.812,80.047 97.23,79.63 U1_S.5@97.23,75.84
NetR8_P_2: R8_P.2 U2_P.5 | length 15.2
  Top Layer w0.25: v2(77.2,79) v2(77.2,80.743)
  Bottom Layer w0.25: v2(77.2,79) 77.23,79 U2_P.5@77.23,76.07 ; v2(77.2,80.743) 77.2,80.754 77.346,80.9 84.968,80.9 85.1,81.032 85.1,82.168 85.232,82.3 R8_P.2
NetR8_S_2: R8_S.2 U2_S.5 | length 18.4
  Top Layer w0.25: v2(110.3,78.5) v2(110.3,80.4)
  Bottom Layer w0.25: U2_S.5@110.23,75.84 110.3,75.84 v2(110.3,78.5) ; v2(110.3,80.4) 120.4,80.4 120.4,82 121.2,82.8 R8_S.2
OSC32_IN: C1.2 IC1.3 Y1.2 | length 15.5
  Top Layer w0.25: Y1.2 141.5,48.95 ; C1.2 141.5,48.95 ; v2(141.5,52.3) 141.5,48.95
  Bottom Layer w0.25: IC1.3 134.723,52.692 134.725,52.695 136.595,52.695 137,53.1 140.7,53.1 v2(141.5,52.3)
OSC32_OUT: C2.2 IC1.4 Y1.1 | length 12.2
  Top Layer w0.25: v2(138.6,52.3) 138.6,49 ; C2.2 138.8,46.45 138.8,47.4 138.6,47.6 138.6,49 ; Y1.1 138.65,48.95 138.6,49
  Bottom Layer w0.25: IC1.4 138.452,52.192 138.559,52.3 v2(138.6,52.3)
OSC_IN: C3.2 IC1.5 Y2.2 | length 13.6
  Top Layer w0.25: C3.2 128.35,53.95 129.229,53.071 129.229,51.871 129.3,51.8 135.008,51.8 135.091,51.717 v2(135.129,51.717)
  Bottom Layer w0.25: IC1.5@133.217,51.667 135.079,51.667 v2(135.129,51.717)
OSC_OUT: C4.2 IC1.6 Y2.1 | length 16.1
  Top Layer w0.25: C4.2 128.368,47.55 128.5,47.682 128.5,48.8 128.6,48.9 130.895,51.195 135.943,51.195 135.959,51.179 136.065,51.179 v2(136.094,51.15)
  Bottom Layer w0.25: IC1.6 136,51.192 136.014,51.179 136.065,51.179 v2(136.094,51.15)
PA0: IC1.14
PA1: IC1.15 J3.4 | length 18.6
  Bottom Layer w0.25: IC1.15 133.2,46.7 135.9,46.7 136.5,46.1 136.5,42.3 144.38,34.42 J3.4
PA2: IC1.16
PA3: IC1.17
PA4: IC1.20
PA5: IC1.21 J3.3 | length 18.7
  Bottom Layer w0.25: IC1.21 129.2,44.2 129.2,41 130,40.2 136.1,40.2 141.84,34.46 J3.3
PA6: IC1.22 J4.4 | length 10.3
  Top Layer w0.25: v2(128.675,42.004) 128.7,41.979 128.7,35.49 J4.4
  Bottom Layer w0.25: v2(128.675,42.004) 128.7,42.029 128.7,44.2 IC1.22
PA7: IC1.23 J4.3 | length 10.2
  Top Layer w0.25: J4.3 127.3,41.7 128.175,42.575 v2(128.175,42.7)
  Bottom Layer w0.25: v2(128.175,42.7) 128.2,42.725 128.2,44.2 IC1.23
PA8: IC1.41 J2.1 | length 23.5
  Top Layer w0.25: v2(118.1,36) v2(118.1,50.175)
  Bottom Layer w0.25: J2.1 114.66,36 v2(118.1,36) ; v2(118.1,50.175) 118.311,50.2 IC1.41@121.865,50.2
PA9: IC1.42 R12.1 | length 30.3
  Top Layer w0.25: R12.1 93.3,50.459 93.5,50.659 v2(93.5,50.7)
  Bottom Layer w0.25: v2(93.5,50.7) 121.708,50.7 IC1.42
PA10: IC1.43 R11.1 | length 34.5
  Top Layer w0.25: R11.1 91.6,51.159 91.7,51.259 v2(91.7,51.3)
  Bottom Layer w0.25: v2(91.7,51.3) 107.8,51.3 110,53.5 116.5,53.5 118.8,51.2 121.708,51.2 IC1.43
PA11: IC1.44
PA12: IC1.45
PA15: IC1.50
PB0: IC1.26
PB1: IC1.27
PB2: IC1.28
PB3: IC1.55 R7_P.2 U1_P.6 U2_P.6 | length 99.1
  Top Layer w0.25: v2(63,78.75) 63.6,79.35 75.609,79.35 75.959,79 v2(76,79) 79.1,75.9 117.9,75.9 126.771,67.029 126.771,66.796 v2(126.675,66.7)
  Bottom Layer w0.25: R7_P.2 53.8,82.8 56.4,80.2 62.713,80.2 62.859,80.054 62.859,78.85 62.959,78.75 v2(63,78.75) 63,76.11 U1_P.6@62.96,76.07 ; U2_P.6@75.96,76.07 76,76.07 v2(76,79) ; v2(126.675,66.7) 126.7,66.675 IC1.55@126.7,55.732
PB4: IC1.56 R4_P.2 U2_P.2 | length 74
  Top Layer w0.25: v2@81.093,78.907 83.2,76.8 118.4,76.8 v2(127.3,67.9)
  Bottom Layer w0.25: U2_P.2@81.04,76.07 81,76.11 81,78.919 81.041,78.959 v2(81.041,79) ; U2_P.2 81.08,79.854 81.226,80 83.4,80 84.3,79.1 R4_P.2 ; IC1.56@127.2,55.701 v2@127.2,67.759
PB5: IC1.57 R3_S.2 U1_S.2 | length 58.7
  Top Layer w0.25: v2(99.3,80) 99.973,80 v2(101.1,78.873) ; v2@101.102,78.92 102.723,77.3 118.6,77.3 128.025,67.875 128.025,67.816 128.1,67.741 v2(128.1,67.7)
  Bottom Layer w0.25: R3_S.2 92.268,82.3 92.4,82.168 92.4,81.611 93.2,80.812 97.654,80.812 98.466,80 v2(99.3,80) ; U1_S.2@101.04,75.84 101.1,75.9 v2(101.1,78.873) ; IC1.57@127.7,55.779 127.7,61.38 127.65,61.43 127.65,67.25 v2(128.1,67.7)
PB6: IC1.58 R5_P.2 U1_P.3 U2_P.3 | length 92.2
  Top Layer w0.25: v2(66.845,79.975) 66.87,80 75.1,80 v2(75.3,80.2) ; v2(79.77,79) 82.37,76.4 118.036,76.4 128.136,66.3 v2(128.175,66.3)
  Bottom Layer w0.25: U1_P.3@66.77,76.07 66.75,76.07 66.75,79.468 66.816,79.534 66.816,79.946 v2(66.845,79.975) ; v2(75.3,80.2) 75.329,80.229 75.435,80.229 75.474,80.268 79.77,80.268 ; U2_P.3@79.77,76.07 79.8,76.1 79.8,78.929 79.77,78.959 79.77,80.268 ; R5_P.2 85.575,80.7 85.275,80.4 79.902,80.4 79.77,80.268 ; v2(128.175,66.3) 128.2,66.275 IC1.58@128.2,55.731
PB7: IC1.59 R5_S.2 U1_S.3 U2_S.3 | length 63.9
  Top Layer w0.25: v2(112.8,78.5) 113.2,78.1 119.1,78.1 v2(128.9,68.3)
  Bottom Layer w0.25: U1_S.3@99.77,75.84 99.77,79.398 100.222,79.85 112.8,79.85 ; U2_S.3@112.77,75.84 112.8,75.84 v2(112.8,78.5) 112.8,79.85 ; R5_S.2 121.146,81 121,80.854 121,80.434 120.566,80 112.95,80 112.8,79.85 ; IC1.59@128.7,55.758 128.7,56.783 128.65,56.833 128.65,62.421 128.9,62.671 v2(128.9,68.3)
PB8: IC1.61 R7_S.2 U1_S.6 U2_S.6 | length 64.9
  Top Layer w0.25: v2(96,79) 97.3,79 98.8,80.5 107,80.5 v2(109,78.5) 109.8,77.7 118.8,77.7 129.794,66.706 129.704,66.615 129.704,66.429 v2(129.675,66.4)
  Bottom Layer w0.25: R7_S.2 92.7,79.1 93.247,79.647 95.814,79.647 95.96,79.501 U1_S.6 ; U1_S.6@95.96,75.84 96,75.88 v2(96,79) U1_S.6@96,79.1 ; U2_S.6@108.96,75.84 109,75.88 v2(109,78.5) ; v2(129.675,66.4) 129.7,66.375 IC1.61@129.7,55.812
PB9: IC1.62 R4_S.2 U2_S.2 | length 44.7
  Top Layer w0.25: v2(114,78.575) 119.725,78.575 130.3,68 v2(130.3,67.4)
  Bottom Layer w0.25: U2_S.2@114.04,75.84 114.04,78.5 114,78.5 114,79.354 114.146,79.5 122.05,79.5 R4_S.2 ; IC1.62@130.2,55.787 130.2,67.259 130.3,67.359 v2(130.3,67.4)
PB10: IC1.29
PB12: IC1.33
PB13: IC1.34
PB14: IC1.35
PB15: IC1.36
PC0: IC1.8
PC1: IC1.9
PC2: IC1.10
PC3: IC1.11
PC4: IC1.24
PC5: IC1.25
PC6: IC1.37
PC7: IC1.38
PC8: IC1.39 J11.2 | length 10.8
  Bottom Layer w0.25: J11.2 112.14,49.4 113.3,49.4 114.6,48.1 116.9,48.1 118,49.2 IC1.39@121.839,49.2
PC9: IC1.40 J10.2 | length 6.1
  Bottom Layer w0.25: J10.2 115.89,49.4 117.49,49.4 117.679,49.589 117.74,49.65 118.317,49.65 IC1.40@121.796,49.7
PC10: IC1.51
PC11: IC1.52
PC12: IC1.53 R3_P.2 U1_P.2 | length 92.2
  Top Layer w0.25: v2(68,78.75) 71.35,75.4 117.7,75.4 121.772,71.328 121.772,71.286 v2(125.872,67.186)
  Bottom Layer w0.25: R3_P.2 57.5,81.632 58.132,81 67.654,81 68,80.654 v2(68,78.75) U1_P.2@68,76.11 ; IC1.53@125.7,55.713 125.7,56.783 125.65,56.833 125.65,66.923 125.872,67.145 v2(125.872,67.186)
PC13: IC1.2 R13.2 | length 50.9
  Bottom Layer w0.25: R13.2 130.7,98.5 135.775,93.425 135.775,53.603 135.439,53.267 133.951,53.267 133.901,53.217 133.406,53.217 IC1.2@133.389,53.2
RESET: IC1.7 J1.4 | length 44.2
  Top Layer w0.25: v2(134.6,37.1) 134.6,43.4 134,44 134,50.555 134.132,50.686 134.623,50.686 v2(134.7,50.61)
  Bottom Layer w0.25: J1.4@108.5,41.04 112.923,36.617 134.117,36.617 v2(134.6,37.1) ; IC1.7 133.199,50.685 134.625,50.685 v2(134.7,50.61)
SWCLK: IC1.49 J1.2 | length 39.3
  Top Layer w0.25: J1.2@108.5,35.96 107.3,37.16 107.3,56.2 108.5,57.4 v2(109.5,57.4)
  Bottom Layer w0.25: v2(109.5,57.4) 123.568,57.4 123.7,57.268 IC1.49@123.7,55.639
SWDIO: IC1.46 J1.3 | length 29.1
  Top Layer w0.25: J1.3@108.5,38.5 109.7,38.5 110.5,39.3 110.5,53.959 110.4,54.059 v2(110.4,54.1)
  Bottom Layer w0.25: v2(110.4,54.1) 117.2,54.1 118.608,52.692 IC1.46
VBUS: C19.2 C20.2 C21.2 C23.2 IC2.7 IC2.8 J3.1 J4.1 J7.1 J8.1 U3.3 | length 100.3
  Top Layer w0.25: IC2.7 99.3,42.5 ; IC2.8 100.954,44.5 101.1,44.354 101.1,42.646 100.954,42.5 99.3,42.5 ; C20.2 v2(99.325,38.5) 99.325,40 ; C21.2 99.325,40 ; C19.2 99.3,41.5 ; 99.3,41.5 99.3,41.048 99.375,40.973 99.375,40.521 99.325,40.471 99.325,40 ; 99.3,41.5 99.3,42.5
  Top Layer w1: v3(122.1,38.1) 122.1,34.47 J4.1
  Top Layer w2: J8.1 82.649,36.3 85.5,39.151 U3.3
  Bottom Layer w0.25: J7.1 99.1,37.465 99,37.565 99,37.697 99,38.134 v2@99.325,38.459 ; v2(99.325,38.5) 99.354,38.529 99.354,38.635 99.375,38.656 99.375,42.865 99.325,42.915 99.325,46
  Bottom Layer w1: J8.1 82.6,34.499 82.6,37.412 C23.2 83.95,37.45 92.5,46 99.3,46 ; 99.5,46 109.4,46 117.3,38.1 v3(122.1,38.1) 135.4,38.1 137,36.5 137,35.026 136.884,34.911 136.884,34.474 J3.1
VS_P: C14.1 C15_P.1 C15_S.1 C16_P.1 C16_S.1 C25.1 J5.1 J9.1 U1_P.7 U1_S.7 U2_P.7 U2_S.7 | length 63.2
  Bottom Layer w0.5: 108,70.2 124.1,70.2 126.6,72.7 126.6,101.6 120.4,107.8 120.4,111.3 121.14,112.04 J9.1
pads on no net: IC2.1 IC2.2 IC2.10 IC2.12 IC2.13 IC2.14 IC2.15 IC2.16 IC2.17 IC2.19 IC2.20 IC2.21 IC2.22 IC2.23 IC2.24 IC2.27 IC2.28 J7.4 J7.MP1 J7.MP2 J7.MP3 J7.MP4 J7.MP5 J7.MP6 RADIATOR.0
copper on no net: | length 5.6
  Bottom Layer w0.25: 78.5,76.07 78.5,78.838 ; 111.5,75.84 111.5,78.7

## Polygon pours and split planes (outlines as drawn)
VS_P on Bottom Layer "VS_P_L02_P021" (solid, pour order 21): 53,41 53,79 112,79 112,78 112,59 75,59 75,41
GND on Bottom Layer "GND_L02_P020" (solid, pour order 20): 115,79.5 115,70.75 118.5,70.75 118.5,79.5
GND on Bottom Layer "GND_L02_P019" (solid, pour order 19): 102,79.55 102,72 105.25,72 105.25,79.55
GND on Bottom Layer "GND_L02_P018" (solid, pour order 18): 82.04,80 82.04,73 85,73 85,80
GND on Bottom Layer "GND_L02_P017" (solid, pour order 17): 69,80 69,72.5 72,72.5 72,80
M-_P on Bottom Layer "M-_P_L02_P004" (solid, pour order 4): 60,81.5 60,117.5 71.5,117.5 71.5,81.5
M+_S on Bottom Layer "M+_S_L02_P008" (solid, pour order 8): 105.5,81.27 117,81.27 117,117.27 105.5,117.27
M+_P on Bottom Layer "M+_P_L02_P006" (solid, pour order 6): 72.5,81.5 84,81.5 84,117.5 72.5,117.5
M-_S on Bottom Layer "M-_S_L02_P002" (solid, pour order 2): 93,81.27 93,117.27 104.5,117.27 104.5,81.27
GND on Top Layer "GND_polygon" (solid, remove dead copper, pour order 14): 52.5,122.5 145,122.5 145,32.5 52.5,32.5
M+_P on Top Layer "M+_P_L01_P013" (solid, pour order 13): 72.5,81.5 72.5,117.5 84,117.5 84,81.5
M-_P on Top Layer "M-_P_L01_P000" (solid, pour order 0): 60,81.5 60,117.5 71.5,117.5 71.5,81.5
M+_S on Top Layer "M+_S_L01_P007" (solid, pour order 7): 105.62,81.15 117.12,81.15 117.12,117.15 105.62,117.15
M-_S on Top Layer "M-_S_L01_P003" (solid, pour order 3): 93,81.27 93,117.27 104.5,117.27 104.5,81.27

## Silkscreen, mask and mechanical layers (free items; w line width, h text height)
Top Overlay:
  text "M P" at 89.25,123.5 h2 r180
  text "M S" at 121.25,123.25 h2 r180
  text "fan" at 131.4,117.6 h2 r180
  text "+ -" at 127.2,113.4 h2 r270
  text "+" at 69.367,47.8 h2 r270
  text "+3V T GND" at 110.55,47.45 h0.6 r90
  text "+3V T GND" at 114.3,47.45 h0.6 r90
  text "+24V" at 72,46.25 h2 r270
  text "BTN" at 112,40.5 h2
  text "Enc P" at 121.25,39.75 h2
  text "Enc S" at 135.75,39.75 h2
  text "+5 G A B" at 123.2,38.2 h0.8
  text "+5 G A B" at 136.95,38.2 h0.8
  text "+ -" at 111.7,37.95 h2
  text "-" at 69.2,36.8 h2 r270
  text "+5V" at 73.5,35 h2
  text "COM" at 95.25,33 h2
  text "+3V CLK DIO RES GND" at 106.8,32.95 h0.6 r90
  text "+ -" at 73.2,31.95 h2
Mechanical 4:
  the board outline again, w0.254